# Altium PCB lightSoakV1-InAmp-piggyback-PCB.PcbDoc
Units mm, origin at the board's own origin, x right, y up, seen from the top; angles counter-clockwise.
Board outline 8 x 5.8 mm, 2 copper layers (Top Layer, Bottom Layer); 6 components, 9 nets, 25 pads, 7 vias.
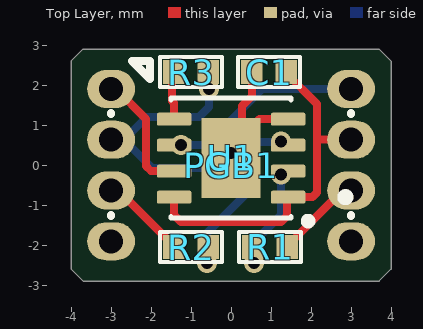
[diagram p0: Top Layer view]
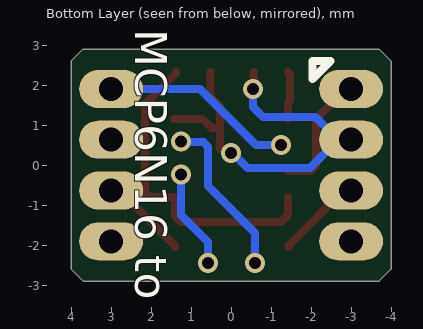
[diagram p1: Bottom Layer view, seen from below]
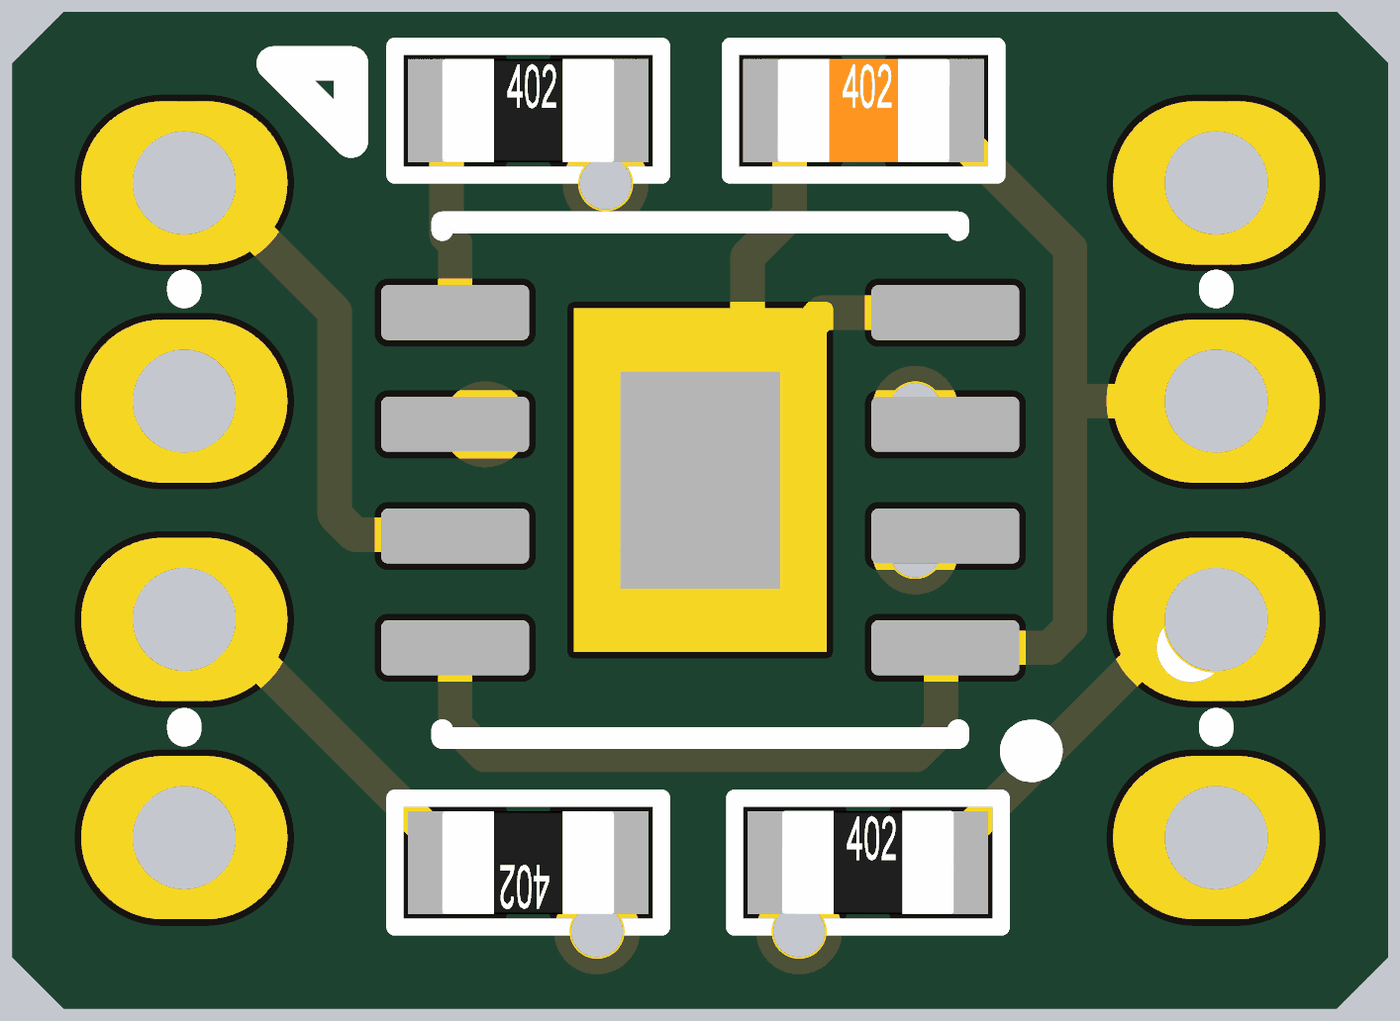
[diagram p2: 3D render of the assembled board from above, using the file's embedded part models]

## Layer stack, top to bottom
Top Solder: solder mask 0.0102, Solder Resist, Dk 3.5
Top Layer: signal copper 0.0356
Dielectric 1: dielectric 0.32, FR-4, Dk 4.8
Bottom Layer: signal copper 0.0356
Bottom Solder: solder mask 0.0102, Solder Resist, Dk 3.5

## Board outline
-4,-2.6 -4,2.6 -3.7,2.9 3.7,2.9 4,2.6 4,-2.6 3.7,-2.9 -3.7,-2.9

## Design rules (kind name [scope] priority, off if disabled: settings)
BoardOutlineClearance [All] p1: gap=0.2 ignorepadtopadclearanceinfootprint=FALSE
Clearance [All] p1: gap=0.15 ignorepadtopadclearanceinfootprint=FALSE except(0.25: Arc-Hole Track-Hole THPad-Hole Via-Hole Fill-Hole Poly-Hole Region-Hole Text-Hole)
ComponentClearance [All] p1: gap=0 collisioncheckmode=3 verticalgap=0 showdistances=TRUE
DiffPairsRouting [All] p1: maxlimit=0.15 minlimit=0.15 mostfreqgap=0.15 toplayer_minwidth=0.2 toplayer_maxwidth=0.335 toplayer_prefwidth=0.335 bottomlayer_minwidth=0.2 bottomlayer_maxwidth=0.335 bottomlayer_prefwidth=0.335 impedanceprofiledriven=TRUE impedanceprofileid={C2F5FF65-82FF-485B-A6D6-999E515194F7} maxuncoupledlength=12.7
Height [All] p1: minheight=0 maxheight=1816.048 prefheight=12.7
HoleSize [All] p1: absolutevalues=TRUE maxlimit=6.3 minlimit=0.3 maxpercent=80.000 minpercent=20.000
HoleToHoleClearance [All] p1: gap=0.25 allowstackedmicrovias=FALSE
MinimumAnnularRing [All] p1: minimumring=0.076
MinimumSolderMaskSliver [All] p1: minsoldermaskwidth=0
PasteMaskExpansion [All] p1: expansion=0 percent=-10.000000
PlaneClearance [All] p1: clearance=0.102
PlaneConnect PlaneConnectPowerPads [InPadClass('PowerPads')] p1: planeconnectstyle=Direct reliefexpansion=0.508 reliefentries=4 reliefconductorwidth=0.254 reliefairgap=0.254
PlaneConnect [All] p2: pad.planeconnectstyle=Relief pad.reliefexpansion=0.3 pad.reliefentries=4 pad.reliefconductorwidth=0.102 pad.reliefairgap=0.102 via.planeconnectstyle=Direct via.reliefexpansion=0.3 via.reliefentries=4 via.reliefconductorwidth=0.127 via.reliefairgap=0.127
PolygonConnect PolygonConnectPowerPads [All vs (InPadClass('PowerPads'))] p1: connectstyle=Direct reliefconductorwidth=0.254 reliefentries=4 polygonreliefangle="90 Angle" airgapwidth=0.254
PolygonConnect [All] p2: thpad.connectstyle=Relief thpad.reliefconductorwidth=0.3 thpad.reliefentries=4 thpad.polygonreliefangle="90 Angle" thpad.airgapwidth=0.2 smdpad.connectstyle=Relief smdpad.reliefconductorwidth=0.2 smdpad.reliefentries=4 smdpad.polygonreliefangle="90 Angle" smdpad.airgapwidth=0.2 via.connectstyle=Direct via.reliefconductorwidth=0.127 via.reliefentries=4 via.polygonreliefangle="90 Angle" via.airgapwidth=0.127
RoutingVias [All] p1: holewidth=0.3 width=0.5 viastyle="Through Hole" minholewidth=0.2 minwidth=0.45 maxholewidth=6.3 maxwidth=6.55
SilkToSilkClearance [All] p1: silktosilkclearance=0
SilkToSolderMaskClearance [IsPad] p1: minsilkscreentomaskgap=0.08 clearancetoexposedcopper=TRUE
SolderMaskExpansion SolderMaskExpansion_VIAS [IsVia] p1: expansion=0.102 istentingtop=TRUE // SolderMask expansion for vias (defines tenting)
SolderMaskExpansion [All] p2: expansion=0.038 istentingtop=FALSE
Width [All] p1: maxlimit=1816.048 minlimit=0.09 preferedwidth=0.102 minimp=50.000000 maximp=50.000000 favimp=50.000000
19 further rules are at their usual default settings.

## Components (designator, comment, footprint, x,y, rotation, side; value= is the part's Value field where it differs from the comment)
C1 "PN_C_100n" FPR_0402_C_R0 0.95,2.325 r0 top value=100n
PGB1 "MAX4460 piggyback" "SO-8 piggyback" 0,0 r0 top locked
R1 "PN_R_4k7" FPR_0402_R_R0 0.975,-2.05 r0 top value=4.7k
R2 "PN_R_4k7" FPR_0402_R_R0 -1,-2.05 r180 top value=4.7k
R3 "PN_R_4k7" FPR_0402_R_R0 -1,2.325 r0 top value=4.7k
U1 "MCP6N16-100E/MF" SON65P300X300X100-9N 0,0.175 r180 top

## Footprints (in the part's own frame and the unit in brackets; to place one, negate y for a bottom-side part, rotate by r counter-clockwise, add the part's x,y. Pads: shape width x height; smd on the part's side, far side on the other; paste and mask are expansions set on the pad)
FPR_0402_C_R0 [mm] "SMD Reflow"
  rect 0.54x0.6 smd: 1(-0.43,0) 2(0.43,0)
  silkscreen extent -0.77,-0.38 0.77,0.37, body extent -0.5,-0.3 0.5,0.3, height 0.22
FPR_0402_R_R0 [mm] "SMD Reflow"
  rect 0.54x0.6 smd: 1(-0.43,0) 2(0.43,0)
  silkscreen extent -0.77,-0.38 0.78,0.38, body extent -0.5,-0.3 0.5,0.3, height 0.22
"SO-8 piggyback" [mm]
  oval 1.2x0.95 / inner oval 1.2x0.95 / far side oval 1.6x0.95 hole 0.6 paste-2539.97: 1(-3,1.905) 2(-3,0.635) 3(-3,-0.635) 4(-3,-1.905) 5(3,-1.905) 6(3,-0.635) 7(3,0.635) 8(3,1.905)
  silkscreen extent -3,-1.28 3,1.3
SON65P300X300X100-9N [mm]
  rrect25% 0.86x0.32 smd: 1(-1.425,0.975) 2(-1.425,0.325) 3(-1.425,-0.325) 4(-1.425,-0.975) 5(1.425,-0.975) 6(1.425,-0.325) 7(1.425,0.325) 8(1.425,0.975)
  rect 1.47x2 smd paste-2: 9(0,0)
  silkscreen extent -2.96,-1.5 1.5,1.5

## Part data
C1: library part C, "Capacitor - generic SMD"
R1 R2 R3: library part R, "Resistor - generic SMD"
U1: "Instrumentation Amplifier 1 Circuit Rail-to-Rail 8-DFN-EP (3x3)", Package="DFN-8 Microchip", Availability="In Stock", Check_prices=https://www.snapeda.com/parts/MCP6N16-100E/MF/Microchip/view-part/?ref=eda, MF=Microchip, MP=MCP6N16-100E/MF, Price=None, Purchase-URL=https://pricing.snapeda.com/search/part/MCP6N16-100E/MF/?ref=eda, SnapEDA_Link=https://www.snapeda.com/parts/MCP6N16-100E/MF/Microchip/view-part/?ref=snap

## Via types
v1: diameter 0.5, hole 0.3, Top Layer to Bottom Layer, tented both sides, 7 vias

## Nets (pads, with @x,y where several pads share a name; then routed paths per layer and width w, separated by ;. In a path a pad name is that pad's centre, name@x,y a point inside that pad or via, vN(x,y) a via of type N, cw(c..) or ccw(c..) an arc to the next point about the centre after c; other vN are vias at no path point)
+VDD: C1.2 PGB1.7 U1.1 U1.8 | length 8.8
  Top Layer w0.2: U1.8 -1.425,-1.25 -1.25,-1.425 1.25,-1.425 1.4,-1.275 1.4,-0.825 U1.1 2.033,-0.8 2.15,-0.683 2.15,0.635 ; C1.2 1.38,2.295 2.15,1.525 2.15,0.635 ; PGB1.7 2.15,0.635
GND: C1.1 PGB1.2 R3.2 U1.4 U1.9 | length 10.1
  Top Layer w0.2: R3.2 -0.56,2.315 -0.56,1.91 v1(-0.55,1.9) ; U1.9@-0.025,0.225 U1.9@0.075,0.325 ; U1.9@0.275,0.4 0.275,1.475 0.52,1.72 C1.1 ; U1.9@0.4,0.925 0.485,0.925 0.71,1.15 U1.4
  Bottom Layer w0.2: PGB1.2 PGB1.2@-2.675,0.635 ; v1@-0.55,1.875 -0.55,1.45 -0.8,1.2 -2.11,1.2 PGB1.2@-2.675,0.635 ; v1(0,0.3) -0.04,0.3 -0.409,-0.069 -1.971,-0.069 PGB1.2@-2.675,0.635
IN-NEG: PGB1.6 R1.2 | length 2.2
  Top Layer w0.2: R1.2 1.405,-2.02 2.8,-0.625 PGB1.6@3.025,-0.625
IN-POS: PGB1.3 R2.2 | length 2.1
  Top Layer w0.2: PGB1.3@-2.975,-0.65 -2.8,-0.65 -1.43,-2.02 R2.2
NetR1_1: R1.1 U1.2 | length 2.5
  Bottom Layer w0.2: v1(0.575,-2.45) 0.575,-1.925 1.25,-1.25 v1(1.25,-0.24)
NetR2_1: R2.1 U1.3 | length 4.5
  Top Layer w0.2: v1(-0.6,-2.45) -0.585,-2.435 -0.585,-2.065 R2.1
  Bottom Layer w0.2: v1(-0.6,-2.45) -0.6,-1.7 0.575,-0.525 0.575,0.456 0.692,0.573 1.111,0.573 1.152,0.614 v1@1.152,0.623
  other v1: 1.25,0.59
NetR3_1: R3.1 U1.5 | length 1.2
  Top Layer w0.2: U1.5 -1.425,1.55 -1.475,1.6 -1.475,2.275 R3.1@-1.425,2.325
VFG: PGB1.8 U1.6 | length 4.8
  Bottom Layer w0.2: v1(-1.25,0.5) -0.622,0.5 0.778,1.9 PGB1.8@3,1.9
VOUT: PGB1.1 U1.7 | length 3.1
  Top Layer w0.2: PGB1.1@-2.975,1.9 -2.87,1.9 -2.125,1.155 -2.125,-0.025 -2.008,-0.142 -1.433,-0.142 U1.7
pads on no net: PGB1.4 PGB1.5

## Silkscreen, mask and mechanical layers (free items; w line width, h text height)
Top Overlay:
  lines w0.2: -2.48,2.6 -2.03,2.15 -2.03,2.6 -2.48,2.6
  lines w0.254: 1.978,-1.382 ccw(c1.925,-1.4) 1.981,-1.4
Bottom Overlay:
  lines w0.2: -2.483,2.606 -2.033,2.606 -2.033,2.156 -2.483,2.606
  text "MCP6N16 to MAX4460" at 2.4,3.4 h0.8 r90